# Altium PCB CH32V4x7VET-R0-1v2.PcbDoc (part 1 of 3)
Units mil, origin at the board's own origin, x right, y up, seen from the top; angles counter-clockwise.
Board outline 4188.98 x 2720.08 mil, 2 copper layers (Top Layer, Bottom Layer); 79 components, 117 nets, 431 pads, 739 vias.
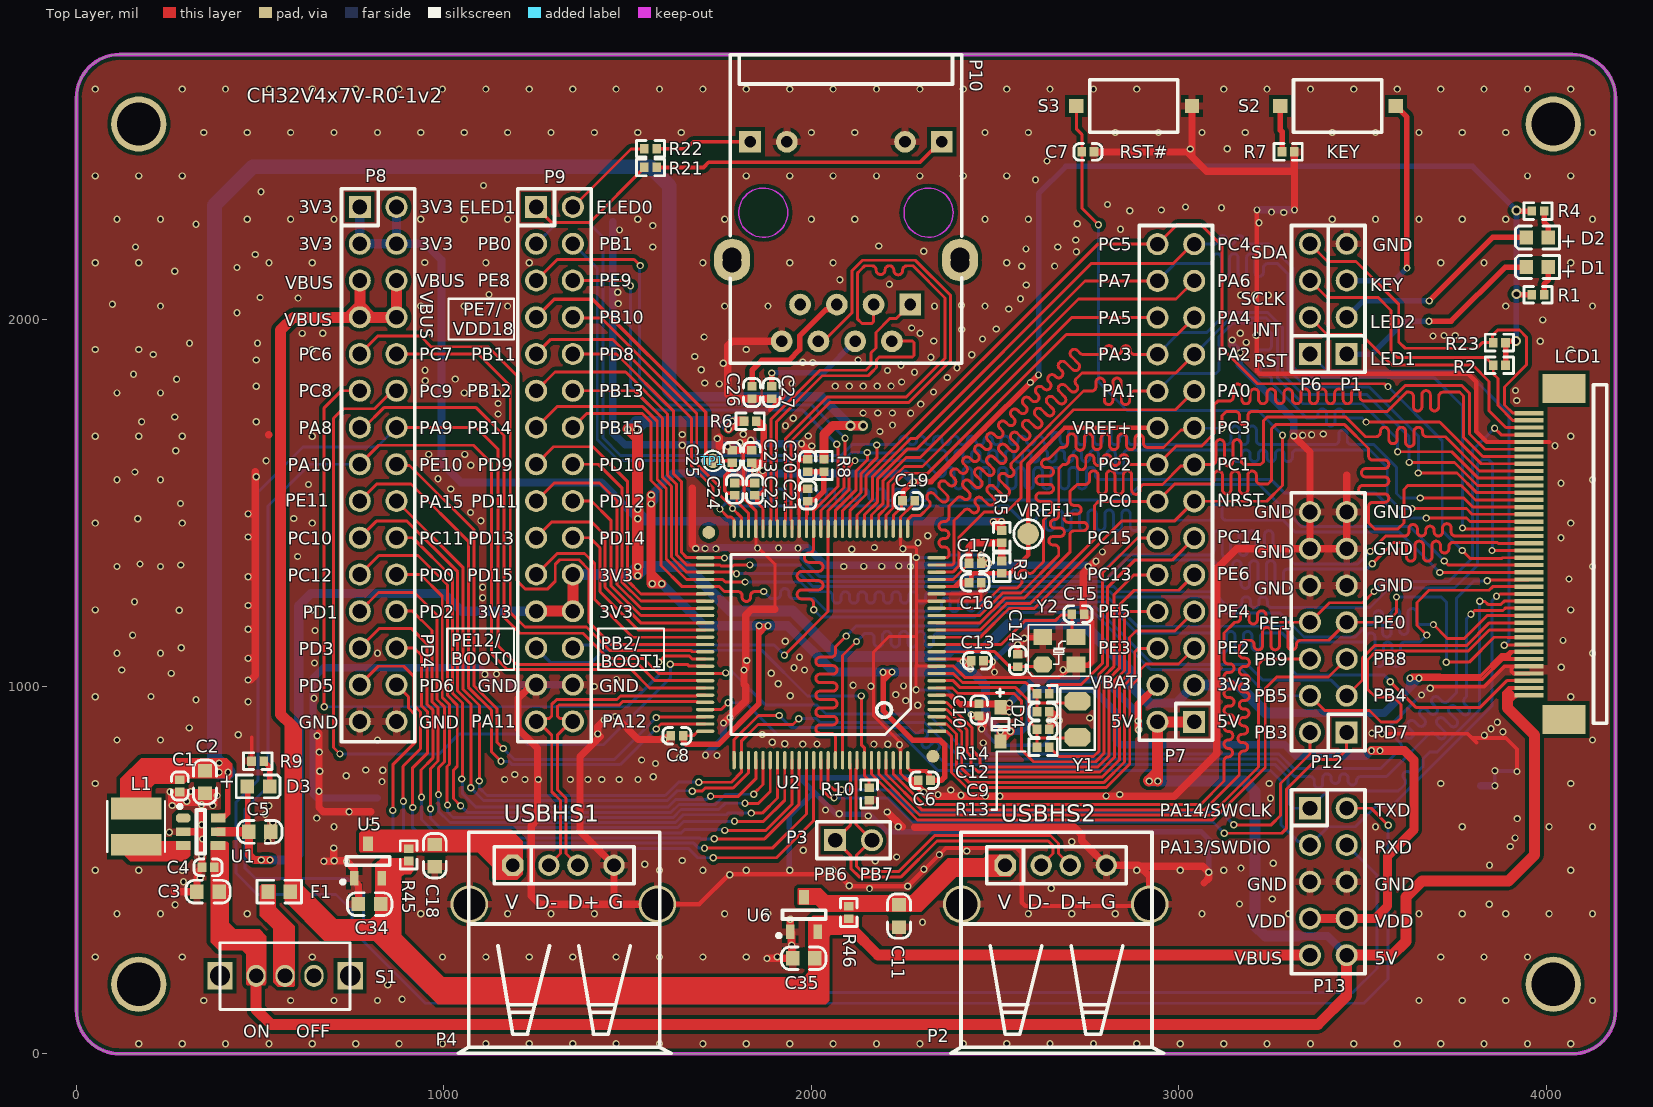
[diagram p0: Top Layer view]
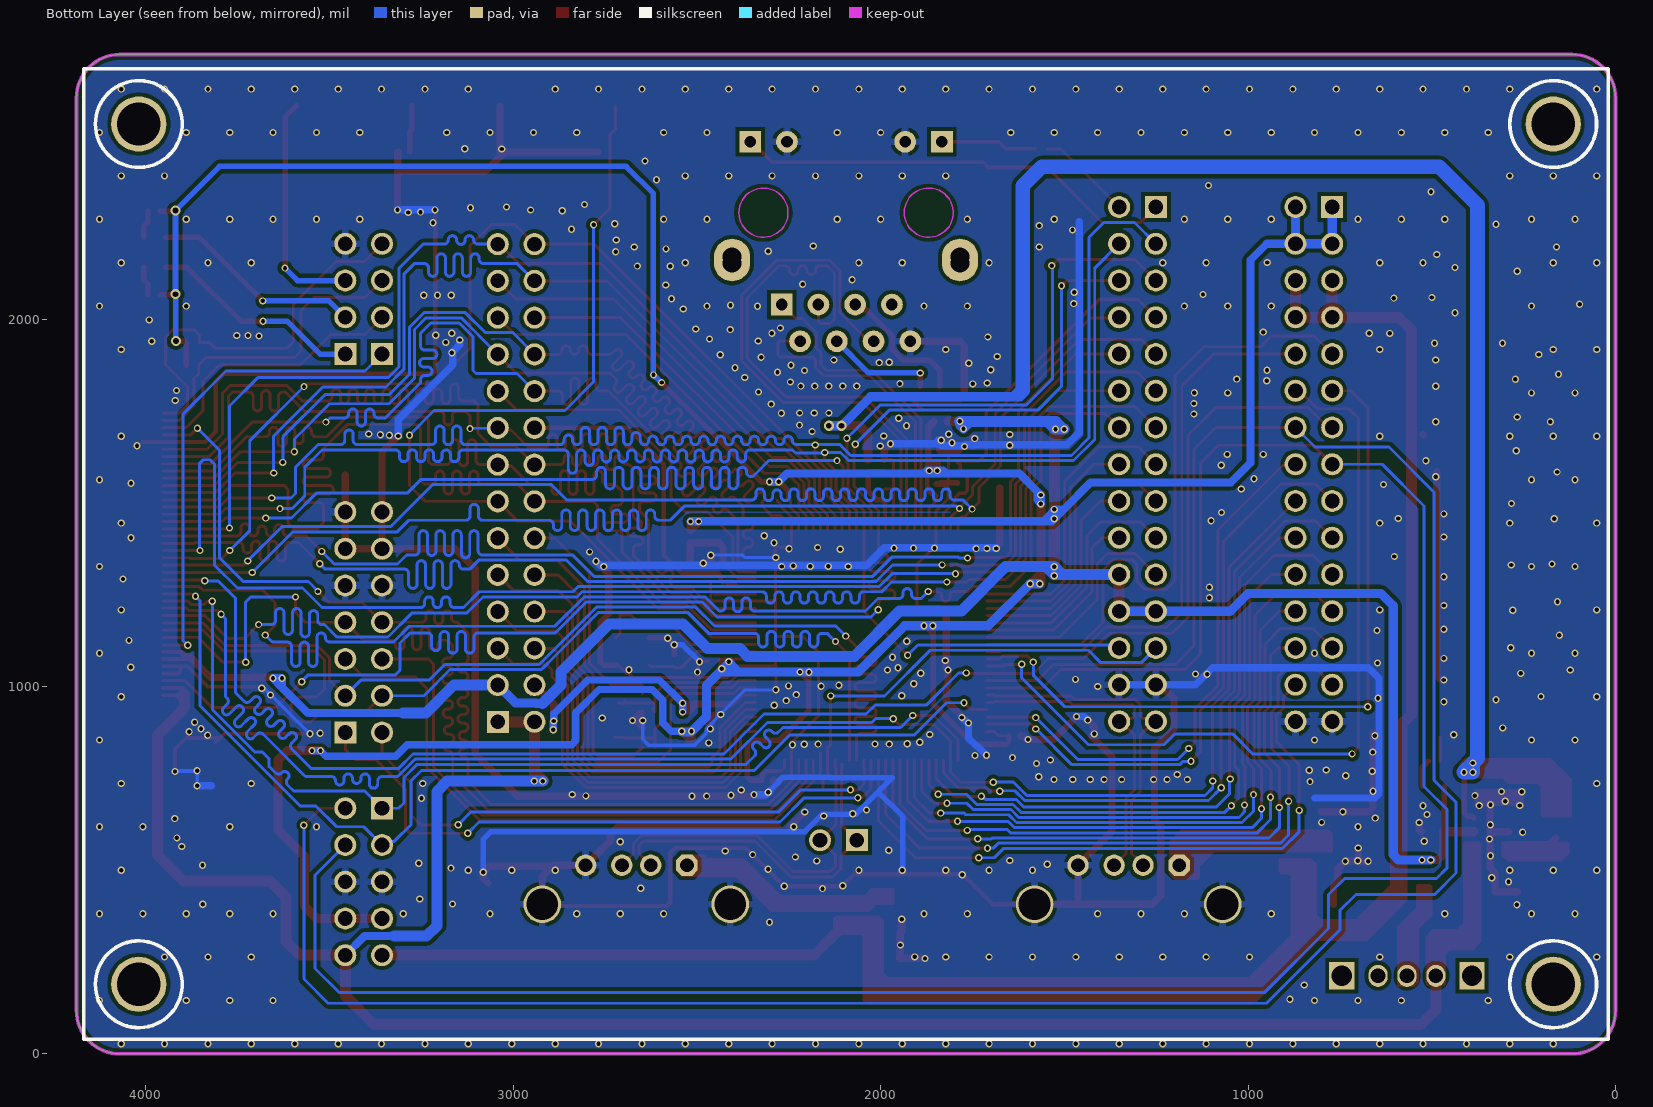
[diagram p1: Bottom Layer view, seen from below]

## Layer stack, top to bottom
Top Solder: solder mask 0.4, Solder Resist, Dk 3.5
Top Layer: signal copper 1.4
Dielectric 1: dielectric 12.6, FR-4, Dk 4.8
Bottom Layer: signal copper 1.4
Bottom Solder: solder mask 0.4, Solder Resist, Dk 3.5

## Board outline
0,118.11 0,2601.97 cw(c118.11,2601.97) 118.11,2720.08 4070.87,2720.08 cw(c4070.87,2601.97) 4188.98,2601.97 4188.98,118.11 cw(c4070.87,118.11) 4070.87,0 118.11,0 cw(c118.11,118.11)

## Design rules (kind name [scope] priority, off if disabled: settings)
Clearance Clearance_1 [InPolygon] p1: gap=10 ignorepadtopadclearanceinfootprint=FALSE
Clearance [All] p2: gap=6 ignorepadtopadclearanceinfootprint=FALSE except(8: Arc-Via Track-Via SMDPad-Via THPad-Via Via-Via Via-Fill Via-Poly Via-Region Via-Hole)
ComponentClearance [All] p1 off: gap=10 collisioncheckmode=3 verticalgap=10 showdistances=FALSE
DiffPairsRouting [All] p1: maxlimit=10 minlimit=7 mostfreqgap=8 toplayer_minwidth=6 toplayer_maxwidth=15 toplayer_prefwidth=8 bottomlayer_minwidth=6 bottomlayer_maxwidth=15 bottomlayer_prefwidth=8 maxuncoupledlength=500
MinimumSolderMaskSliver [All] p1 off: minsoldermaskwidth=10
PolygonConnect PolygonConnect_1 [IsVia] p1: connectstyle=Direct reliefconductorwidth=10 reliefentries=4 polygonreliefangle="90 Angle" airgapwidth=10
PolygonConnect [All] p2: connectstyle=Relief reliefconductorwidth=20 reliefentries=4 polygonreliefangle="90 Angle" airgapwidth=10
RoutingVias [All] p1: holewidth=16 width=28 viastyle="Through Hole" minholewidth=11.81 minwidth=19.68 maxholewidth=28 maxwidth=50
SilkToSilkClearance [All] p1 off: silktosilkclearance=10
SilkToSolderMaskClearance [IsPad] p1 off: minsilkscreentomaskgap=10 clearancetoexposedcopper=TRUE
SolderMaskExpansion [All] p1: expansion=2 istentingtop=FALSE
Width [All] p1: maxlimit=100 minlimit=5 preferedwidth=10
25 further rules are at their usual default settings.

## Classes and differential pairs
component class CH32V4x7V-R0-1v2: C1 C2 C3 C4 C5 C6 C7 C8 C9 C10 C11 C12 C13 C14 C15 C16 C17 C18 C19 C20 C21 C22 C23 C24 C25 C26 C27 C34 C35 D1 D2 D3 D4 F1 L1 LCD1 P1 P2 P3 P4 P6 P7 P8 P9 P10 P12 P13 R1 R2 R3 R4 R5 R6 R7 R8 R9 R10 R13 R14 R21 R22 R23 R45 R46 S1 S2 S3 TP1 U1 U2 U5 U6 VREF1 Y1 Y2
differential pair MDIR: +MDIRP -MDIRN
differential pair MDIT: +MDITN -MDITP
differential pair PA12PA11: +PA12 -PA11
differential pair PB6PB7: +PB6 -PB7

## Components (designator, comment, footprint, x,y, rotation, side; value= is the part's Value field where it differs from the comment)
C1 "NC(0.1uF)" 0402_C 281.67,712.51 r180 top
C2 "NC(10uF)" 0603_C 349.67,709.51 r90 top
C3 "10uF" 0603_C 327.97,441.42 r0 top
C4 "1uF" 0402_C 341.55,507.42 r90 top
C5 "10uF" 0603_C 529.23,604.42 r180 top
C6 "0.1uF" 0402_C 2290.8,744.55 r90 top
C7 "22nF" 0402_C 2769.67,2454.72 r270 top
C8 "0.1uF" 0402_C 1651.2,865.72 r270 top
C9 "12pF" 0402_C 2647.79,883.25 r270 top
C10 "0.1uF" 0402_C 2456.53,919.62 r180 top
C11 "10uF" 0603_C 2238.76,405.31 r270 top
C12 "12pF" 0402_C 2647.79,931.58 r270 top
C13 "0.1uF" 0402_C 2435.12,1069.59 r90 top
C14 "18pF" 0402_C 2561.85,1087.44 r0 top
C15 "18pF" 0402_C 2742.66,1196.96 r270 top
C16 "0.1uF" 0402_C 2429.2,1282.72 r90 top
C17 "0.1uF" 0402_C 2429.2,1335.46 r90 top
C18 "10uF" 0603_C 975.39,569.8 r270 top
C19 "0.1uF" 0402_C 2281.65,1505.47 r270 top
C20 "2.2uF" 0402_C 1990.27,1618.08 r0 top
C21 "0.1uF" 0402_C 1990.27,1537.72 r0 top
C22 "0.1uF" 0402_C 1846.44,1553.59 r0 top
C23 "4.7uF" 0402_C 1838.44,1642.64 r0 top
C24 "NC(0.1uF)" 0402_C 1791.41,1553.59 r0 top
C25 "NC(2.2uF)" 0402_C 1784.41,1642.64 r0 top
C26 "0.1uF" 0402_C 1838.67,1783.2 r180 top
C27 "0.1uF" 0402_C 1891.94,1783.2 r180 top
C34 "10uF" 0603_C 828.23,407.46 r180 top
C35 "10uF" 0603_C 2009.72,260.25 r180 top
D1 "BLUE" 0603+ 4006.24,2141.41 r180 top
D2 "RED" 0603+ 4006.24,2221.95 r180 top
D3 "RED" 0603+ 464.98,728.04 r0 top
D4 "B0520WS" SOD-323 2514.77,943.04 r270 top
F1 "500mA" 0603 582,441.42 r180 top
L1 "NC(2.2uH)" CD32 162.6,618.63 r90 top
LCD1 "NC(MY-RGB)" FPC40P-0.5-FK750M3 4001.2,1360.04 r270 top
P1 "HEADER 4" SIP4-2.54mm 3457.2,1904.72 r180 top
P2 "USBHS2" USBAF 2527.49,513.35 r0 top
P3 "HEADER 2" SIP2-2.54mm 2065.02,581.5 r270 top
P4 "USBHS1" USBAF 1187.49,513.35 r0 top
P6 "NC(HEADER 4)" SIP4-2.54mm 3357.2,1904.72 r180 top
P7 "HEADER 14x2" IDC28-2.54MM 3042.2,903.72 r180 top
P8 "HEADER 15x2" IDC30-2.54MM 771.2,2304.72 r0 top
P9 "HEADER 15x2" IDC30-2.54MM 1251.2,2304.72 r0 top
P10 "HR911105A" HR911105A 2269.49,2039.41 r180 top
P12 "HEADER 7x2" IDC14-2.54mm 3457.2,874.72 r180 top
P13 "LINK" IDC10-2.54mm 3357.2,268.44 r0 top
R1 "1K" 0402 3961.14,2066.03 r0 top
R2 "NC(4.7K)" 0402 3889.47,1874.38 r180 top
R3 "0R" 0402 2518.14,1341.16 r270 top
R4 "1K" 0402 3961.14,2293.88 r0 top
R5 "0R" 0402 2518.14,1424.33 r270 top
R6 "0R" 0402 1816.98,1721.52 r0 top
R7 "10K" 0402 3314.67,2454.72 r180 top
R8 "NC(0R)" 0402 2034.49,1584.62 r90 top
R9 "1K" 0402 510.17,796.79 r180 top
R10 "10K" 0402 2157.34,690.61 r90 top
R13 "NC(0R)" 0402 2647.79,834.91 r180 top
R14 "NC(0R)" 0402 2647.79,979.91 r180 top
R21 "470" 0402 1545.6,2412.62 r0 top
R22 "470" 0402 1545.6,2463.06 r0 top
R23 "NC(4.7K)" 0402 3889.47,1935.82 r180 top
R45 "NC(0Ω)" 0402 903.9,524.81 r90 top
R46 "NC(0Ω)" 0402 2102.24,368 r90 top
S1 "SW SPDT" SW1 567.76,212.3 r0 top
S2 "KEY" SMD_6.1x3.65x2.5mm-KEY 3591.2,2579.72 r180 top
S3 "RST#" SMD_6.1x3.65x2.5mm-KEY 3036.2,2579.72 r180 top
TP1 "Testpoint" TESTPOINT2 1732.05,1613.93 r0 top
U1 "CH2003V" SOT-23-6 291.11,641.82 r270 top
U2 "CH32V407VET" LQFP100 2341.12,877.87 r90 top
U5 "CH213K" SOT-23-3 756.55,477.64 r0 top
U6 "CH213K" SOT-23-3 1943.12,331.76 r0 top
VREF1 "PAD" TESTPOINT1 2590.38,1414.89 r90 top
Y1 "32768Hz" FC-135 2724.35,861.74 r90 top
Y2 "25MHz" XT3225 2629.89,1059.72 r0 top
? "" HOLE 169.69,189.37 r180 bottom
? "Comment" HOLE 169.69,2530.71 r180 bottom
? "Comment" HOLE 4019.29,2530.71 r180 bottom
? "Comment" HOLE 4019.29,189.37 r180 bottom

## Footprints (in the part's own frame and the unit in brackets; to place one, negate y for a bottom-side part, rotate by r counter-clockwise, add the part's x,y. Pads: shape width x height; smd on the part's side, far side on the other; paste and mask are expansions set on the pad)
0402 [mm]
  rect 0.6x0.65 smd mask+0.051: 1(0,0) 2(0.85,0)
  silkscreen extent -0.55,-0.58 1.4,0.57
0402_C [mm]
  rect 0.65x0.6 smd mask+0.051: 1(0,0) 2(0,-0.85)
  silkscreen extent -0.58,-1.4 0.57,0.55
0603 [mm]
  rect 0.93x0.98 smd: 1(0,0) 2(1.54,0)
  silkscreen extent -0.76,-0.79 2.3,0.79
0603+ [mm]
  rect 0.93x0.98 smd: 1(0,0) 2(1.54,0)
  silkscreen extent -0.76,-0.79 2.27,0.79
0603_C [mm]
  rect 0.93x0.98 smd mask+0.051: 1(0,0) 2(1.54,0)
  silkscreen extent -0.76,-0.79 2.31,0.79
CD32 [mm]
  rect 1.5x3.5 smd: 1(-1.25,0) 2(1.25,0)
  silkscreen extent -1.75,-2 1.75,2
FC-135 [mil]
  oct 50x70 smd: 1(0,0) 2(98.43,0)
  silkscreen extent -35,-47 133,47
FPC40P-0.5-FK750M3 [mm]
  rect 2x3 smd: 0(-11.436,1.202) 0(11.436,1.202)
  rect 0.3x2 smd: 1(9.75,-1.202) 2(9.25,-1.202) 3(8.75,-1.202) 4(8.25,-1.202) 5(7.75,-1.202) 6(7.25,-1.202) 7(6.75,-1.202) 8(6.25,-1.202) 9(5.75,-1.202) 10(5.25,-1.202) 11(4.75,-1.202) 12(4.25,-1.202) 13(3.75,-1.202) 14(3.25,-1.202) 15(2.75,-1.202) 16(2.25,-1.202) 17(1.75,-1.202) 18(1.25,-1.202) 19(0.75,-1.202) 20(0.25,-1.202) 21(-0.25,-1.202) 22(-0.75,-1.202) 23(-1.25,-1.202) 24(-1.75,-1.202) 25(-2.25,-1.202) 26(-2.75,-1.202) 27(-3.25,-1.202) 28(-3.75,-1.202) 29(-4.25,-1.202) 30(-4.75,-1.202) 31(-5.25,-1.202) 32(-5.75,-1.202) 33(-6.25,-1.202) 34(-6.75,-1.202) 35(-7.25,-1.202) 36(-7.75,-1.202) 37(-8.25,-1.202) 38(-8.75,-1.202) 39(-9.25,-1.202) 40(-9.75,-1.202)
  silkscreen extent -11.7,3.24 11.7,4.17, body extent -12.2,-1.75 12.2,4.55, height 2
HOLE [mm]
  round 3.81 hole 3: 0(0,0)
  silkscreen extent -3,-3 3,3
HR911105A [mm]
  rect 1.5x1.5 hole 0.8: 1(0,0) 9(-2.175,-11.252) 12(11.075,-11.252)
  round 1.5 hole 0.8: 2(1.27,2.54) 3(2.54,0) 4(3.81,2.54) 5(5.08,0) 6(6.35,2.54) 7(7.62,0) 8(8.89,2.54) 10(0.365,-11.252) 11(8.535,-11.252)
  round 2.5 hole 1.3: ""(-3.43,-2.852) ""(-3.43,-3.3) ""(12.32,-3.3) ""(12.32,-2.852)
  Keep-Out Layer circle w0.1: c10.165,-6.352 r1.7
  Keep-Out Layer circle w0.1: c-1.265,-6.352 r1.7
  silkscreen extent -3.55,-17.27 12.45,4.06
IDC10-2.54mm [mil]
  rect 60x60 hole 40: 1(0,400)
  round 60 hole 40: 2(100,400) 3(0,300) 4(100,300) 5(0,200) 6(100,200) 7(0,100) 8(100,100) 9(0,0) 10(100,0)
  silkscreen extent -50,-50 150,450
IDC14-2.54mm [mil]
  rect 60x60 hole 40: 1(0,0)
  round 60 hole 40: 2(100,0) 3(0,-100) 4(100,-100) 5(0,-200) 6(100,-200) 7(0,-300) 8(100,-300) 9(0,-400) 10(100,-400) 11(0,-500) 12(100,-500) 13(0,-600) 14(100,-600)
  silkscreen extent -50,-652 151,50
IDC28-2.54MM [mil]
  rect 60x60 hole 40: 1(0,0)
  round 60 hole 40: 2(100,0) 3(0,-100) 4(100,-100) 5(0,-200) 6(100,-200) 7(0,-300) 8(100,-300) 9(0,-400) 10(100,-400) 11(0,-500) 12(100,-500) 13(0,-600) 14(100,-600) 15(0,-700) 16(100,-700) 17(0,-800) 18(100,-800) 19(0,-900) 20(100,-900) 21(0,-1000) 22(100,-1000) 23(0,-1100) 24(100,-1100) 25(0,-1200) 26(100,-1200) 27(0,-1300) 28(100,-1300)
  silkscreen extent -50,-1351 150,50
IDC30-2.54MM [mil]
  rect 60x60 hole 40: 1(0,0)
  round 60 hole 40: 2(100,0) 3(0,-100) 4(100,-100) 5(0,-200) 6(100,-200) 7(0,-300) 8(100,-300) 9(0,-400) 10(100,-400) 11(0,-500) 12(100,-500) 13(0,-600) 14(100,-600) 15(0,-700) 16(100,-700) 17(0,-800) 18(100,-800) 19(0,-900) 20(100,-900) 21(0,-1000) 22(100,-1000) 23(0,-1100) 24(100,-1100) 25(0,-1200) 26(100,-1200) 27(0,-1300) 28(100,-1300) 29(0,-1400) 30(100,-1400)
  silkscreen extent -50,-1455 150,50
LQFP100 [mm]
  round 0.889 smd: 0(-1.727,0.254) 0(13.746,15.748)
  rect 0.229x1.27 smd mask+0.051: 1(0,0)
  oval 0.229x1.27 smd mask+0.051: 2(0.5,0) 3(1,0) 4(1.5,0) 5(2,0) 6(2.5,0) 7(3,0) 8(3.5,0) 9(4,0) 10(4.5,0) 11(5,0) 12(5.5,0) 13(6,0) 14(6.5,0) 15(7,0) 16(7.5,0) 17(8,0) 18(8.5,0) 19(9,0) 20(9.5,0) 21(10,0) 22(10.5,0) 23(11,0) 24(11.5,0) 25(12,0) 51(12,16) 52(11.5,16) 53(11,16) 54(10.5,16) 55(10,16) 56(9.5,16) 57(9,16) 58(8.5,16) 59(8,16) 60(7.5,16) 61(7,16) 62(6.5,16) 63(6,16) 64(5.5,16) 65(5,16) 66(4.5,16) 67(4,16) 68(3.5,16) 69(3,16) 70(2.5,16) 71(2,16) 72(1.5,16) 73(1,16) 74(0.5,16) 75(0,16)
  oval 1.27x0.229 smd mask+0.051: 26(14,2) 27(14,2.5) 28(14,3) 29(14,3.5) 30(14,4) 31(14,4.5) 32(14,5) 33(14,5.5) 34(14,6) 35(14,6.5) 36(14,7) 37(14,7.5) 38(14,8) 39(14,8.5) 40(14,9) 41(14,9.5) 42(14,10) 43(14,10.5) 44(14,11) 45(14,11.5) 46(14,12) 47(14,12.5) 48(14,13) 49(14,13.5) 50(14,14) 76(-2,14) 77(-2,13.5) 78(-2,13) 79(-2,12.5) 80(-2,12) 81(-2,11.5) 82(-2,11) 83(-2,10.5) 84(-2,10) 85(-2,9.5) 86(-2,9) 87(-2,8.5) 88(-2,8) 89(-2,7.5) 90(-2,7) 91(-2,6.5) 92(-2,6) 93(-2,5.5) 94(-2,5) 95(-2,4.5) 96(-2,4) 97(-2,3.5) 98(-2,3) 99(-2,2.5) 100(-2,2)
  silkscreen extent -0.22,1.79 12.21,14.21
SIP2-2.54mm [mil]
  rect 60x60 hole 40: 1(0,0)
  round 60 hole 40: 2(0,100)
  silkscreen extent -50,-50 50,150
SIP4-2.54mm [mil]
  rect 60x60 hole 40: 1(0,0)
  round 60 hole 40: 2(0,-100) 3(0,-200) 4(0,-300)
  silkscreen extent -50,-350 50,50
SMD_6.1x3.65x2.5mm-KEY [mm]
  rect 1x1 smd: 1(0,0) 2(8,0)
  silkscreen extent 0.98,-1.83 7.08,1.83
SOD-323 [mm]
  rect 1x0.83 smd: 1(0,0) 2(2.36,0)
  silkscreen extent -1.28,-0.6 1.58,0.6
SOT-23-3 [mm] "SOT-23-3"
  rect 0.6x1 smd: 1(0,0) 2(1.9,0)
  rect 0.7x1 smd: 3(0.95,2.4)
  silkscreen extent -0.93,-0.38 2.45,1.49
SOT-23-6 [mm] "SOT-23-6"
  oct 0.6x1 smd: 1(0,0)
  rect 0.6x1 smd: 2(0.95,0) 3(1.9,0) 5(0.95,2.4) 6(0,2.4)
  rect 0.6x1.04 smd: 4(1.9,2.4)
  silkscreen extent -0.93,-0.38 2.45,1.49
SW1 [mm]
  rect 1.75x1.9 hole 1.4: 0(-4.5,0) 0(4.5,0)
  oval 1.321x1.524 hole 1.016: 1(0,0) 2(-2,0) 3(2,0)
  silkscreen extent -4.51,-2.31 4.5,2.29
TESTPOINT1 [mm]
  round 1.5 smd: 1(0,0)
  silkscreen extent -1,-1 1,1
TESTPOINT2 [mm]
  round 1 smd: 1(0,0)
  silkscreen extent -0.7,-0.7 0.7,0.7
USBAF [mm]
  round 2.6 hole 2.2: 0(-3,-2.7) 0(10,-2.7)
  oct 1.473x1.473 hole 0.965: 1(0,0)
  round 1.473 hole 0.965: 2(2.5,0) 3(4.5,0) 4(7,0)
  silkscreen extent -3.75,-12.99 10.95,2.29
XT3225 [mm]
  oct 1.3x1.1 smd: 1(0,0)
  rect 1.3x1.1 smd: 2(2.3,0) 3(2.3,1.9) 4(0,1.9)
  silkscreen extent -1.02,-0.8 3.27,2.74

## Part data
C1 C2 C3 C4 C5 C6 C7 C8 C9 C10 C11 C12 C13 C14 C15 C16 C17 C18 C19 C20 C21 C22 C23 C24 C25 C26 C27 C34 C35: library part CAP, "Capacitor"
D1 D2 D3: library part LED0, "Typical INFRARED GaAs LED", LatestRevisionDate=08-Jul-2005, LatestRevisionNote="Mech Layer 1 removed.", PackageDescription="LED; 2 Leads", PackageReference=LED-0, Published=8-Jun-2000, Publisher="Altium Limited"
D4: library part DIODE, "Diode"
F1: library part FUSE1, "Fuse"
L1: library part INDUCTOR
LCD1: library part MY-RGB
P1: "Header, 4-Pin"
P2 P4: library part USB, "USB Port"
P3: "Header, 2-Pin"
P6: library part "HEADER 4", "Header, 4-Pin"
P7: "Header, 14-Pin, Dual row"
P8 P9: "Header, 15-Pin, Dual row"
P12: "Header, 7-Pin, Dual row"
P13: library part "Header 5X2H", "Header, 5-Pin, Dual row, Right Angle", LatestRevisionDate=17-Jul-2002, LatestRevisionNote="Re-released for DXP Platform.", Publisher="Altium Limited"
R1 R2 R4 R7 R9 R10 R13 R14 R21 R22 R23 R45 R46: library part RES
R3 R5 R6 R8: library part R
S2 S3: library part KEY1
TP1: "测试点"
U1: "Step-Down DC-DC Converter, 5V input, 1.23V * 800mA output, with LDO 3.3V * 200mA"
U2: "RISC-V FPU HD-MCU, 175MHz, USB_480M, 100M Ethernet & Phy, CAN, DVP, ADC, DAC"
U5 U6: "Ideal Diode 5V*1A"
VREF1: "焊盘"
Y1 Y2: library part XTAL, "Crystal Oscillator", LatestRevisionDate=17-Jul-2002, LatestRevisionNote="Re-released for DXP Platform.", PackageDescription="Crystal, Thru-Hole; 2 Leads; Body 3.1 x 8.2 mm (Dia.xH)", PackageReference=R38, Published=8-Jun-2000, Publisher="Altium Limited"

## Via types
v1: diameter 19.68, hole 11.81, Top Layer to Bottom Layer, tented both sides, 734 vias
v2: diameter 27.56, hole 15.75, Top Layer to Bottom Layer, tented both sides, 5 vias

## Nets (pads, with @x,y where several pads share a name; then routed paths per layer and width w, separated by ;. In a path a pad name is that pad's centre, name@x,y a point inside that pad or via, vN(x,y) a via of type N, cw(c..) or ccw(c..) an arc to the next point about the centre after c; other vN are vias at no path point)
1V2: C1.2 C2.2 L1.2 R8.2 U1.6 | length 4806.4
  Top Layer w15: U1.6@385.6,641.82 389.91,646.13 403.45,646.13 412.24,654.92 412.24,758.07 v1@407.69,762.61
  Top Layer w25: L1.2@162.6,684.85 162.6,721.08 208.57,767.05 C2.2@346.59,767.05 ; R8.2@2034.49,1618.77 2034.49,1685.49 2059.17,1710.16 2106.37,1710.16 2106.86,1709.67 2107.67,1709.67 2107.85,1709.49 v2(2141.16,1709.49) ; C2.2@346.59,767.05 412.13,767.05 412.13,768.11 387.84,792.41 371.94,792.41 C2.2@346.59,767.05
  Bottom Layer w25: 1605.61,1821.61 1605.61,1803.79 1620.96,1788.44 1640.92,1788.44 ; 1613.09,1816.27 1640.92,1788.44 ; v2(2141.16,1709.49) v2(2106.37,1709.49) 2027.42,1788.44 1640.92,1788.44
  Bottom Layer w40: 1613.09,1816.27 1613.09,2363.02 1562.12,2413.99 479.8,2413.99 375.63,2309.82 375.63,804.2 v1(388.29,791.54) ; v1(388.29,791.54) 412.58,767.24 v1(412.58,766.18) v1(388.29,766.18) v1(388.29,791.54)
3V3: C5.2 D3.1 LCD1.6 LCD1.7 P7.3 P8.1 P8.2 P8.3 P8.4 P9.22 P9.23 P9.24 R5.1 R6.1 U1.5 | length 9386.6
  Top Layer w10: v1@3628.45,1022.51 v1@3631.01,1022.51 ; v1@3629.62,1025.24 3633.92,1029.54 3711.25,1029.54 ; v1@3630.17,1023.35 v1@3631.01,1022.51 ; v1@3654.88,1019.76 3826.11,1019.76 3880.98,1074.62 3881.14,1074.62 ; v1@3654.88,1029.23 3822.19,1029.23 3878.43,1085.47 3891.99,1085.47 ; 3680.55,1022.51 v1@3631.01,1022.51 ; 3680.89,1022.17 v1(3653.86,1022.17) 3631.35,1022.17 v1@3631.01,1022.51 ; 3888.75,1080.73 3892.11,1080.73 3898.22,1074.62 ; 3899.79,1077.8 3899.79,1085.47 ; LCD1.6@3953.86,1074.62 3898.22,1074.62 ; LCD1.7@3953.86,1094.31 3908.63,1094.31 ; 3881.14,1074.62 3891.99,1085.47 ; 3881.14,1074.62 3898.22,1074.62 ; 3891.99,1085.47 3899.79,1085.47 ; 3891.99,1085.47 3900.83,1094.31 3908.63,1094.31 ; 3899.79,1085.47 3908.63,1094.31
  Top Layer w15: D3.1@464.98,728.04 466.79,726.23 466.79,606.23 C5.2@468.6,604.42
  Top Layer w20: v1(2495.61,1448.95) 2496.08,1448.48 v1@2514.44,1448.48 ; v1@2495.98,1447.37 2495.98,1445.51 2517.15,1424.33 R5.1@2518.14,1424.33 2518.14,1448.72 v1(2517.9,1448.95)
  Top Layer w22: C5.2@468.6,604.42 468.6,597.57 470.04,596.13 470.04,541.6 483.93,527.71 v1(503.03,527.71) ; v1@503.09,527.71 v1(526.75,527.71)
  Top Layer w25: U1.5@385.6,604.42 C5.2@468.6,604.42 ; v1(1774.54,1700.9) 1795.17,1721.52 R6.1@1816.98,1721.52
  Top Layer w30: P9.23@1251.2,1204.72 P9.24@1351.2,1204.72 P9.22@1351.2,1304.72 ; v1(1500.69,1700.13) v1(1524.11,1700.13) 1527.23,1697.02 1527.23,1675.74 ; v1@1504.51,1698.46 1527.23,1675.74 ; v1@1527.45,1304.48 v1(1527.45,1325.93) 1527.69,1326.18 v1(1527.69,1456.1) v1(1527.69,1481.86) 1527.23,1482.32 1527.23,1675.74
  Bottom Layer w22: P8.4@871.2,2204.72 949.43,2204.72 994.11,2160.05 994.11,1607.92 1047.16,1554.88 1428.92,1554.88 1501.93,1481.86 ; v1(2517.9,1448.95) 2517.35,1449.5 1556.94,1449.5 ; 3300.47,927.67 3559.37,927.67 3629.22,997.52 ; v1@3629.22,1020.22 3629.22,997.52 ; v1(3629.48,1022.17) 3652.47,1022.17 v1@3653.14,1021.5 ; v1(3653.86,1022.17) 3629.22,997.52 ; 1501.93,1481.86 v1(1527.69,1456.1) ; 1501.93,1481.86 v1(1527.69,1481.86) v1@1527.69,1478.76 ; v1(1527.69,1456.1) v1@1527.69,1478.76 ; v1(1527.69,1456.1) 1534.29,1449.5 1556.94,1449.5 ; v1@1527.69,1478.76 1556.94,1449.5
  Bottom Layer w25: v1(503.03,527.71) v1(526.75,527.71) 590.6,527.71 605.25,542.36 605.25,1219.58 638.89,1253.22 999.98,1253.22 1048.48,1204.72 P9.23@1251.2,1204.72 P9.24@1351.2,1204.72 ; P8.1@771.2,2304.72 P8.3@771.2,2204.72 P8.4@871.2,2204.72 P8.2@871.2,2304.72 ; 1752.48,1720.52 1754.92,1720.52 v1(1774.54,1700.9) 1784.48,1710.83 1784.48,1720.52 v1(1784.48,1721.52) ; 2920.08,953.72 2936.69,953.72 2937.69,954.72 2993.2,954.72 P7.3@3042.2,1003.72
  Bottom Layer w30: P9.22@1351.2,1304.72 1506.24,1304.72 ; v1(1500.69,1700.13) v1(1524.11,1700.13) 1526.31,1700.13 1546.7,1720.52 ; v1@1506.25,1703.21 1523.56,1720.52 1546.7,1720.52 ; 1548.64,1325.41 1527.95,1304.72 1506.24,1304.72 ; 1752.48,1720.52 1546.7,1720.52 ; 1754.92,1720.52 1784.48,1720.52 v1@1785.38,1720.52 ; 2920.08,953.72 2870.03,1003.77 2870.03,1038.99 2739.22,1169.8 2537.65,1169.8 2470.92,1103.07 2383.35,1103.07 2362.38,1082.1 2071.46,1082.1 1948.35,1205.21 1780.73,1205.21 1660,1325.93 v1(1527.45,1325.93) 1506.24,1304.72 ; P7.3@3042.2,1003.72 3161.99,1003.72 3238.04,927.67 3275.09,927.67 3300.47,927.67
  other v1: 1527.45,1301.08
+5V: C3.2 C4.2 LCD1.1 LCD1.2 P7.1 P7.2 P13.10 S1.2 U1.4 | length 6455.2
  Top Layer w10: 3884.89,960.75 3884.89,976.27 3884.89,982.8 3894.25,992.17 3897.97,995.88 3906.89,995.88 ; 3887.27,973.57 3887.27,976.27 3894.9,983.89 ; 3899.16,960.91 3905.11,960.91 3912.21,968.01 ; 3904.02,976.2 3902.22,976.2 3894.9,983.52 ; LCD1.1@3916.97,972.77 3912.21,968.01 ; LCD1.1@3953.86,976.2 3920.39,976.2 3913.54,976.2 ; LCD1.2@3953.86,995.88 3906.89,995.88 ; 3894.9,983.52 3894.9,983.89 ; 3894.9,983.52 3894.9,965.06 3905.03,975.19 ; 3894.9,983.89 3900.05,989.04 ; 3900.05,989.04 3903.74,992.74 3906.89,995.88 ; 3900.05,989.04 3900.7,989.04 3903.14,986.61 3906.5,983.24 3913.54,976.2 ; 3905.03,975.19 3906.04,976.2 3913.54,976.2 ; 3905.03,975.19 3912.21,968.01
  Top Layer w30: U1.4@387.1,563.52 387.1,507.42 387.1,442.92 C3.2@388.6,441.42 ; S1.2@489.02,212.3 489.02,120.93 529.4,80.55 3379.72,80.55 3457.2,158.03 P13.10@3457.2,268.44 3580.78,268.44 3618.14,305.81 3618.14,426.34 3662.69,470.88 3897.63,470.88 3967.8,541.04 3967.8,867.94 3894.9,940.84 3894.9,965.06 ; v1@2917.87,743.34 2942.2,767.67 ; v1(2919.56,742.31) 2920.78,743.53 v1@2940.64,743.53 ; v1(2942.7,742.31) 2942.2,742.81 2942.2,767.67 ; P7.1@3042.2,903.72 P7.2@2942.2,903.72 2942.2,767.67
  Top Layer w40: U1.4@388.6,558.76 388.6,330.76 406.17,313.18 471.45,313.18 489.02,295.61 S1.2@489.02,212.3
  Bottom Layer w22: 3324.78,320.31 3405.33,320.31 P13.10@3457.2,268.44
  Bottom Layer w30: v1(2919.56,742.31) v1(2942.7,742.31) 3180.02,742.31 3207.99,714.35 3207.99,348.4 3236.08,320.31 3324.78,320.31
BOOT0: P9.25 R10.2 U2.94 | length 1225.9
  Top Layer w8: v1(2136.18,974.21) 2136.18,841.36 2144.27,833.27 2144.27,757.59 2157.34,744.52 R10.2@2157.34,724.07
  Bottom Layer w8: P9.25@1251.2,1104.72 1291.2,1064.72 1401.04,1064.72 1434.79,1098.48 1865.24,1098.48 1989.51,974.21 v1(2136.18,974.21)
BOOT1: LCD1.25 P9.26 U2.37 | length 3914.4
  Top Layer w8: v1(1926.84,1084.7) 2045.85,1203.71 U2.37@2045.85,1429.05 2045.85,1478.4 2103.17,1535.72 2103.17,1598.99 v1(2118.86,1614.68) ; v1(3674,1458.17) 3783.55,1458.17 3793.08,1448.64 LCD1.25@3953.86,1448.64
  Bottom Layer w8: P9.26@1351.2,1104.72 1358.96,1112.48 1899.06,1112.48 v1(1926.84,1084.7) ; v1(2118.86,1614.68) 2304.46,1614.68 2337,1582.14 2344.51,1574.63 ccw(c2353,1583.11) 2365,1583.11 2365,1584.46 cw(c2377,1584.46) 2389,1584.46 2389,1549.61 ccw(c2401,1549.61) 2413,1549.61 2413,1584.46 cw(c2425,1584.46) 2437,1584.46 2437,1549.61 ccw(c2449,1549.61) 2461,1549.61 2461,1584.46 cw(c2473,1584.46) 2485,1584.46 2485,1549.61 ccw(c2497,1549.61) 2509,1549.61 2509,1584.46 cw(c2521,1584.46) 2533,1584.46 2533,1549.61 ccw(c2545,1549.61) 2557,1549.61 2557,1584.46 cw(c2569,1584.46) 2581,1584.46 2581,1549.61 ccw(c2593,1549.61) 2605,1549.61 2605,1584.46 cw(c2617,1584.46) 2629,1584.46 2629,1549.61 ccw(c2641,1549.61) 2653,1549.61 2653,1584.46 cw(c2665,1584.46) 2677,1584.46 2677,1549.61 ccw(c2689,1549.61) 2701,1549.61 2701,1584.46 cw(c2713,1584.46) 2725,1584.46 2725,1549.61 ccw(c2737,1549.61) 2749,1549.61 2749,1584.46 cw(c2761,1584.46) 2773,1584.46 2773,1575.68 ccw(c2785,1575.68) 2785,1563.68 2806.1,1563.68 3250.68,1563.68 3287.32,1527.04 3534.65,1527.04 3603.52,1458.17 v1(3674,1458.17)
ELED0: P9.2 R22.1 | length 260
  Top Layer w8: P9.2@1351.2,2304.72 1509.53,2463.06 R22.1@1545.6,2463.06
ELED1: P9.1 R21.1 | length 374.9
  Top Layer w8: P9.1@1251.2,2304.72 1293.77,2262.15 1396.12,2262.15 1545.6,2411.63 R21.1@1545.6,2412.62
GND: C1.1 C2.1 C3.1 C4.1 C5.1 C6.1 C7.1 C8.2 C9.1 C10.1 C11.2 C12.1 C13.2 C14.1 C15.1 C16.2 C17.2 C18.2 C19.1 C20.1 C21.1 C22.1 C23.1 C24.1 C25.1 C26.1 C27.1 C34.2 C35.2 LCD1.4 LCD1.5 LCD1.36 P1.4 P2.0 P2.4 P4.0 P4.4 P8.29 P8.30 P9.27 P9.28 P10.8 P10.10 P10.11 P12.9 P12.10 P12.11 P12.12 P12.13 P12.14 P13.5 P13.6 R7.1 R9.2 R10.1 S3.1 U1.2 U2.10 U2.19 U2.20 U2.27 U2.41 U2.47 U2.99 U5.1 U6.1 Y2.2 Y2.4 | length 23551.1
  Top Layer w8: 1814.96,1561.45 1816.95,1559.45 1816.95,1556.45 1816.95,1553.93 1816.95,1509.93 1849,1477.89 U2.47@1849,1429.05 1849,1384.5 1900.9,1332.6 1900.9,1209.72 ; 1815.65,1560.86 1815.65,1642.64 1815.65,1643.91 1815.96,1644.22 ; 1823.72,1546.64 C22.1@1847.41,1546.64 ; U2.41@1967.11,1429.05 1967.11,1479.67 1965.48,1481.3 1965.48,1538.01 ; C20.1@1988.27,1618.08 1970.16,1618.08 1965.48,1613.39 1965.48,1538.01 ; C21.1@1990.27,1537.72 1965.77,1537.72 1965.48,1538.01 ; 2271.49,746.19 2259.64,746.19 ; C19.1@2281.65,1505.47 2273.84,1497.66 2273.84,1491.95 2242.7,1460.81 U2.27@2242.7,1429.05 2242.7,1384.74 2247.38,1380.05 2281.21,1380.05 2285.9,1375.37 v1(2285.9,1350.96) ; v1(2285.33,990.73) 2285.33,1058.23 2286.83,1059.73 ; v1@2286.83,1350.03 2286.83,1232.2 ; C6.1@2290.8,744.55 2273.13,744.55 2261.28,744.55 2259.64,746.19 ; U2.20@2341.12,1251.89 2454.35,1251.89 2462.67,1260.21 ; C16.2@2462.67,1282.72 2462.67,1260.21 ; C13.2@2468.58,1069.59 2470.86,1067.31 v1(2493.4,1067.31) ; v1@2495.63,1064.66 2495.63,1057.61 2496.46,1056.78 2496.46,1027.08 2494.08,1024.71 ; v1(2685.03,1045.33) 2687.27,1043.1 2687.27,1035.18 ; Y2.2@2720.44,1057.72 2714.5,1057.72 2691.97,1035.18 2687.27,1035.18 ; 2259.64,746.19 2242.7,763.14 U2.99@2242.7,799.13 2242.7,846.52 2169.12,920.09 2169.12,1093.11 2211.69,1135.68 2286.83,1135.68 ; 2286.83,1059.73 2286.83,1135.68 ; 2286.83,1059.73 2291.52,1055.04 U2.10@2341.12,1055.04 2387.38,1055.04 2417.71,1024.71 2494.08,1024.71 ; 2286.83,1135.68 2286.83,1232.2 ; 2286.83,1232.2 U2.19@2341.12,1232.2 2457.98,1232.2 2462.67,1236.89 2462.67,1260.21 ; 2494.08,1024.71 2674.5,1024.71 2682.74,1032.95 2685.03,1032.95 2687.27,1035.18
  Top Layer w10: R9.2@476.71,796.79 476.71,861.5 ; C9.1@2647.79,883.25 2647.79,888.99 v1(2647.79,907.41) C12.1@2647.79,931.58 ; v1(3553.39,871.42) 3786.2,871.42 3798.13,859.49 ; v1@3689.85,998.71 3830.3,998.71 3886.53,1054.94 3912.39,1054.94 ; 3810.31,847.31 3798.13,859.49 ; v1(3920.71,768.68) 3920.71,828.9 3890.12,859.49 3798.13,859.49 ; LCD1.4@3953.86,1035.25 3911.37,1035.25 3905.87,1040.75 3905.87,1048.42 3912.39,1054.94 ; LCD1.5@3953.86,1054.94 3912.39,1054.94
  Top Layer w12: P4.0@1595.13,407.61 1695.09,407.61 v1@1776.58,489.1 ; v1(1777.95,487.73) v1@1776.58,489.1 ; 1874.82,1778.88 1913.8,1778.88 ; 1887.74,1752.82 1913.8,1778.88 ; 1922.99,1788.07 1913.8,1778.88 ; v1@2103.26,456.43 v1(2262.48,456.43) 2366.33,560.29 2559.3,560.29 2566.67,552.92 2567.01,552.92 2572.7,547.23 2572.7,411.78 2582.14,402.33 2916.47,402.33 P2.0@2921.19,407.06 ; v1(2103.26,457.8) 2071.96,489.1 v1@1776.58,489.1 ; v1(3212.9,2296.99) 3212.9,1858.33 3219.93,1851.31 3787.67,1851.31 3809.58,1829.4 3809.58,1693.74 3838.15,1665.17 LCD1.36@3953.86,1665.17 4008.37,1665.17
  Top Layer w15: C1.1@277.6,709.42 279.1,707.92 344.1,707.92 C2.1@345.6,706.42 ; C24.1@1791.41,1553.59 1791.75,1553.93 1816.95,1553.93 C22.1@1837.17,1553.93 ; 1814.96,1556.45 1816.95,1556.45 ; C22.1@1847.41,1551.64 1847.46,1551.59 C22.1@1848.44,1551.59 ; v1@2557.77,1106.74 v1@2561.74,1110.71 ; v1(2561.63,1113.28) 2561.74,1113.17 v1@2561.74,1110.71 ; C14.1@2561.85,1087.44 2561.74,1087.55 v1@2561.74,1110.71 ; Y2.4@2629.89,1132.52 2583.55,1132.52 2565.21,1114.17 2563.79,1114.17 2562.97,1113.35 2562.97,1111.94 v1@2561.74,1110.71 ; Y2.2@2720.44,1057.72 2754.05,1057.72 2762.98,1066.64 2762.98,1175.66 C15.1@2742.66,1195.98
  Top Layer w20: 267.37,441.42 C3.1@327.97,441.42 327.97,492.86 341.55,506.44 C4.1@341.55,507.42 v1@341.55,592.71 ; U1.2@291.11,604.42 329.84,604.42 v1@341.55,592.71 ; C2.1@344.1,707.92 341.55,705.37 v1@341.55,592.71 ; v1(467.28,1017.7) 474.33,1017.7 486.43,1029.81 486.43,1076.25 ; v1(467.28,1076.25) 486.43,1076.25 ; v1(467.28,1155.41) 486.43,1155.41 ; v1(467.28,1220.18) 486.43,1220.18 ; v1(467.28,1298.81) 486.43,1298.81 ; v1(467.28,1406.54) 486.43,1406.54 ; v1(467.28,1469.55) 486.43,1469.55 ; 486.43,1584.19 486.43,1469.55 ; 522.81,1684.85 523.02,1684.64 ; C5.1@529.23,604.42 534.39,609.58 v1(534.39,629.55) ; v1@660.2,873.01 660.2,670.6 671.92,658.88 v1(742.13,658.88) 801.54,658.88 ; v1(673.43,524.23) 700.39,524.23 v1(701.5,525.34) ; v1(700.29,560.33) 700.29,526.54 v1(701.5,525.34) ; U5.1@756.55,477.64 756.55,502.87 v1(735.29,524.13) 734.08,525.34 v1(701.5,525.34) ; U5.1@757,478.28 757,469.31 767.6,458.72 C34.2@767.6,407.46 ; P9.27@1251.2,1004.72 1240.38,1004.72 1215.08,979.43 1213.43,979.43 1201.72,967.71 1201.72,884.48 1254.78,831.42 1254.78,638.03 1238.02,621.28 1238.02,429.99 1260.95,407.06 1456.54,407.06 ; v1(1418.71,870.88) 1418.71,890.59 v1(1436.42,908.31) ; 1425.75,863.84 1370.53,808.62 1370.53,605.91 P4.4@1463.08,513.35 1463.08,413.6 1456.54,407.06 ; v1(1466.95,917.96) 1529.29,855.61 v1(1599,855.61) 1603.63,855.61 1610.94,862.93 1615.93,862.93 1617.74,864.74 C8.2@1617.74,865.72 ; P4.0@1581.19,407.06 1456.54,407.06 ; 1676.38,1539.49 1676.38,1386.19 v1@1685.29,1377.29 ; 1749.52,1653.65 v1@1749.52,1678.02 ; v1(1760.91,900.4) 1821.63,961.11 1821.63,1000.69 1817.07,1005.25 v1(1817.07,1044.84) 1821.63,1049.4 1821.63,1193.87 1837.48,1209.72 1900.9,1209.72 ; C25.1@1787.84,1642.99 1788.18,1642.64 1791.41,1642.64 1815.65,1642.64 C23.1@1838.44,1642.64 ; 1818.49,1664.62 C23.1@1837.33,1645.77 ; C23.1@1837.33,1643.76 C23.1@1837.33,1645.77 ; v1@1837.33,1668.14 C23.1@1837.33,1645.77 ; C23.1@1839.35,1643.76 C23.1@1837.33,1645.77 ; v1(1879.68,259.75) 1880.19,260.25 v1@1910.86,260.25 ; C27.1@1891.94,1783.2 C26.1@1838.67,1783.2 1784.48,1783.2 1772.76,1794.91 1772.76,1927.69 1784.48,1939.41 P10.8@1919.49,1939.41 ; v1(1907.28,263.84) v1@1910.86,260.25 ; v1(1942.56,366.08) 1942.56,332.32 U6.1@1943.12,331.76 ; U6.1@1946.65,330.29 1946.65,262.7 C35.2@1949.09,260.25 v1@1910.86,260.25 ; v1(1973.44,1660.22) 1990.27,1643.39 C20.1@1990.27,1618.08 ; v1(2206.74,658.39) 2247.34,617.79 ; 2271.4,746.28 2271.49,746.19 2273.13,744.55 2290.8,726.88 ; 2280.82,616.28 2716.36,616.28 2736.51,596.13 2736.51,579.93 P2.4@2803.08,513.35 2890.46,513.35 2892.9,510.92 ; C6.1@2290.8,744.55 2290.8,726.88 ; v1@2440.92,921.06 2455.09,921.06 C10.1@2456.53,919.62 ; C10.1@2455.53,918.62 2456.51,918.62 C10.1@2462.61,912.53 ; v1@2460.63,1357.32 2460.85,1357.09 2460.85,1337.27 C17.2@2462.67,1335.46 2480.29,1335.46 v1@2480.62,1335.13 ; C10.1@2462.61,919.72 C10.1@2462.61,912.53 ; v1(2463.52,884.39) 2462.61,885.31 C10.1@2462.61,912.53 ; 2468.5,896.07 2468.5,906.64 C10.1@2462.61,912.53 ; C9.1@2647.79,888.99 2665.96,907.15 v1(2675.41,907.15) 2657.06,925.5 C12.1@2653.82,925.5 ; C15.1@2740.62,1198.7 2740.62,1306.5 v1(2774.7,1340.58) ; C7.1@2769.67,2454.72 3023.15,2454.72 3036.2,2441.67 ; P2.0@2921.19,407.06 2921.19,482.63 2892.9,510.92 ; S3.1@3036.2,2579.72 3036.2,2441.67 ; 3068.73,464.82 3081.65,477.74 3081.65,494.31 v1(3081.52,494.44) 3065.04,510.92 2892.9,510.92 ; v1(3313.25,1681.79) 3357.2,1637.84 P12.14@3357.2,1474.72 P12.12@3357.2,1374.72 ; R7.1@3314.67,2454.72 3314.67,2408.74 ; v1(3315.2,2296.99) 3315.2,2408.2 3314.67,2408.74 ; 3457.2,1574.72 P12.13@3457.2,1474.72 P12.11@3457.2,1374.72 P12.12@3357.2,1374.72 ; 486.43,1076.25 486.43,1155.41 ; 486.43,1155.41 486.43,1220.18 ; 486.43,1220.18 486.43,1298.81 ; 486.43,1298.81 486.43,1406.54 ; 486.43,1406.54 486.43,1469.55 ; 2290.8,726.88 2301.53,716.15 2301.53,714.8 2314.87,701.46 2987.95,701.46 3103.36,816.88 3103.36,1320.09 3157.99,1374.72 P12.12@3357.2,1374.72 ; 3036.2,2441.67 3075.6,2402.27 3308.2,2402.27 3314.67,2408.74
  Bottom Layer w8: v1(2285.33,990.73) 2369.55,990.73 2456.58,903.7 2456.58,902.28 ; v1(2285.9,1350.96) 2370.11,1350.96 2376.39,1357.24 v1(2462.83,1357.24)
  Bottom Layer w10: 2456.58,902.28 2474.99,883.88 2474.99,872.15 2507.59,839.54 2630.89,839.54 2647.79,856.44 v1(2647.79,907.41) ; v1(3553.39,871.42) 3553.98,871.42 3661.59,979.03 3662.17,979.03 3676.17,993.03 v1@3687.47,993.03 ; v1@3860.53,730.57 v1(3860.53,770.76) 3861.57,769.72 3919.67,769.72 v1(3920.71,768.68)
  Bottom Layer w15: v1@1939.71,499.25 1939.71,645.75 2006.92,712.96 ; v1@2301.53,716.15 2279.42,738.26 2279.42,740.55 2267.05,752.92 2137.78,752.92 2136.46,751.6 1968.28,751.6 2006.92,712.96 ; v1(2493.4,1067.31) 2539.37,1113.28 v1(2561.63,1113.28) ; v1(3081.52,494.44) 3081.52,584.69 3061.15,605.07 2205.99,605.07 2158.4,652.65 2067.23,652.65 2006.92,712.96
  Bottom Layer w20: 819.19,696.54 655.73,696.54 644.01,708.25 644.01,1022.2 672.53,1050.72 1097.18,1050.72 1143.18,1004.72 P9.27@1251.2,1004.72 P9.28@1351.2,1004.72 ; v1(1436.42,908.31) 1446.08,917.96 v1(1466.95,917.96) ; 1460.09,2264.42 1460.09,1690.54 1493.14,1657.49 1771.77,1657.49 1774.3,1654.96 1833.49,1654.96 1843.49,1664.96 v1@1843.49,1669.98 ; v1@1685.29,1377.29 1990.01,1377.29 2037.89,1329.41 2763.53,1329.41 v1(2774.7,1340.58) ; v1(1712.02,812.41) 1736.22,836.61 1738.14,836.61 1760.91,859.39 v1@1760.91,897.1 ; v1(1760.91,900.4) v1@1760.91,897.1 ; v1(1779.11,915.3) v1@1760.91,897.1 ; 1843.49,1660.22 v1(1973.44,1660.22) ; v1@2301.53,716.15 2312.13,705.55 v1(2344.93,705.55) ; v1(3145.6,1942.74) 3145.6,1929.88 v1(3167.12,1908.37) 3164.56,1905.81 3164.56,1874.84 3313.25,1726.15 v1(3313.25,1681.79) ; v1(3212.9,2296.99) v1(3315.2,2296.99) ; 3821.24,729.65 v1(3860.53,729.65)
  other v1: 169.58,27.24 287.69,27.24 405.8,27.24 523.91,27.24 642.02,27.24 760.14,27.24 878.25,27.24 996.36,27.24 1114.47,27.24 1232.58,27.24 1350.69,27.24 1468.8,27.24 1586.91,27.24 1705.02,27.24 1823.13,27.24 1941.24,27.24 2059.35,27.24 2177.46,27.24 2295.57,27.24 2413.68,27.24 2531.79,27.24 2649.9,27.24 2768.01,27.24 2886.12,27.24 3004.23,27.24 3122.34,27.24 3240.45,27.24 3358.56,27.24 3476.67,27.24 3594.78,27.24 3712.89,27.24 3831,27.24 3949.11,27.24 4067.22,27.24 346.75,145.35 582.97,145.35 701.08,145.35 819.19,145.35 3653.84,145.35 3771.95,145.35 3890.06,145.35 4126.28,145.35 886.42,148.53 847.6,187.35 51.47,263.46 287.69,263.46 642.02,263.46 996.36,263.46 1114.47,263.46 1232.58,263.46 1350.69,263.46 1468.8,263.46 1586.91,263.46 1705.02,263.46 1823.13,263.46 3712.89,263.46 3831,263.46 3949.11,263.46 1946.39,296.35 2302.51,358.28 110.53,381.57 228.64,381.57 464.86,381.57 937.3,381.57 1173.52,381.57 1291.63,381.57 1409.74,381.57 1764.07,381.57 1882.18,381.57 2590.84,381.57 2708.95,381.57 2827.06,381.57 3063.28,381.57 3299.5,381.57 3653.84,381.57 3771.95,381.57 3890.06,381.57 4008.17,381.57 4126.28,381.57 268.53,406.08 3845.06,407.16 3165.31,408 3254.73,421.67 2158.62,449.81 2653.3,450.58 291.49,468.6 336.77,479.3 51.47,499.68 169.58,499.68 287.69,499.68 1586.91,499.68 1705.02,499.68 1823.13,499.68 1941.24,499.68 2059.35,499.68 2886.12,499.68 3004.23,499.68 3122.34,499.68 4067.22,499.68 2306.42,502.31 3169.37,505.55 3846.03,513.62 1546.81,515.73 3257.32,518.85 2174.02,525.14 1648.8,526.3 2232.23,535.98 340.45,539.31 2348.65,542.26 2423.13,552.21 1978.2,553.89 3902.48,564.32 2708.99,577.4 520.86,578.75 343.3,584.88 3915.58,587.72 252.93,603.06 701.08,617.79 2236.51,617.79 3535.72,617.79 3771.95,617.79 4008.17,617.79 4126.28,617.79 340.71,623.84 800,630.03 3921.38,640.3 653.92,641.69 2155.26,647.36 513.39,651.27 2076.02,653.54 2038.55,663.76 524.07,675.12 261.05,676.08 371.1,675.62 340.35,678.15 300.4,687.61 3249.71,695.98 2473.87,701.47 2513.58,701.27 2802.43,702.15 382.93,702.92 2407.43,703.81 2839.74,705.85 255.27,713.21 2306.33,712.27 310.28,714.04 660.17,714.87 2379.79,718 51.47,735.9 3246.44,735.77 3712.89,735.9 4067.22,735.9 831.79,740.95 1165.31,746.83 1220.49,746.83 1257.31,746.83 1344.4,746.83 1392.07,746.83 1429.94,746.83 1477.61,746.83 1528.4,746.83 1569.7,754.21 734.17,757.15 1192.82,760.48 661.96,769.15 833.46,772.13 787.52,772.76 1576.17,790.13 1538.2,799.65 1641.54,806.22 1743.27,812.1 660.63,821.24 2240.01,841.15 1976.47,842.97 2170.37,843.08 2208.17,842.44 1928.05,843.8 2015.69,843.46 2468.3,846.39 1893.57,847.94 110.53,854.01 228.64,854.01 819.19,854.01 4126.28,854.01 655.01,866.06 3831.98,867.04 440.31,868.45 1866.65,868.97 3525.82,872.43 3882.32,876.81 3850.07,885.13 307.12,887.13 3867.36,902.42 2757.95,913.88 2435.19,923.54 2289.62,948.64 467.28,958.07 2256.81,961.48 325.41,964.05 646.49,967.74 51.47,972.12 4067.22,972.12 202.92,972.69 1942.95,974.79 3660.77,976.87 2229.71,977.74 3684.85,994.88 1409.35,999.78 2162.29,1000.2 2250.95,1001.54 2113.9,1002.95 1910.3,1007.07 1469.67,1019.19 1111.71,1033.09 1143.37,1033.75 257.9,1035.53 1891.01,1035.64 2498.46,1039.05 123.62,1044.61 1981.54,1044.57 1952.98,1050.56 4040.91,1052.14 648.05,1063.89 1824.42,1070.42 1967.95,1079.36 110.53,1090.23 228.64,1090.23 819.19,1090.23 4126.28,1090.23 285.16,1105.19 1929.02,1122.67 4045.95,1125.26 2579.84,1131.04 152.9,1139.51 649.18,1152.22 280.11,1207.15 51.47,1208.34 642.02,1208.34 4067.22,1208.34 157.95,1230.37 1105.43,1241.48 1105.43,1269.71 4062.31,1292.26 2754.08,1326.14 110.53,1326.45 228.64,1326.45 2088.65,1326.47 2142.78,1326.76 2191.95,1326.76 2269.77,1326.34 4126.28,1326.45 2237.75,1328.12 284.15,1330.32 173.09,1333.35 2483.16,1335.56 601.92,1353.45 2792.32,1366.12 2110.1,1373.54 1740.4,1375.16 2249.32,1374.96 1685.29,1375.46 1711.02,1375.46 1853.68,1376.47 1910.76,1376.47 1963.93,1376.47 2171.79,1378.03 2290.58,1391.35 4040.32,1404.81 2317.22,1410.38 51.47,1444.57 287.69,1444.57 642.02,1444.57 4067.22,1444.57 1100.74,1450.67 167.03,1456.52 591.4,1456.93 1072.53,1473.24 283.14,1497.91 1018.76,1537.41 631.51,1549.7 4040.32,1552.82 110.53,1562.68 228.64,1562.68 4126.28,1562.68 984,1565.33 489.18,1570.51 159.13,1583.75 1073.32,1601.8 516.22,1613.98 958.67,1631.47 1056.92,1631.47 270.17,1641.36 1772.08,1653.11 2001.32,1654.52 4024.16,1654.79 1648.86,1656.49 1806.07,1663.39 1835.49,1669.98 1743.77,1674.43 51.47,1680.79 169.58,1680.79 287.69,1680.79 642.02,1680.79 4067.22,1680.79 1991.76,1681.64 3337.16,1683.94 3361.78,1685.01 1648.86,1685.53 1814.81,1686.49 3393.35,1686.88 2186.78,1693.91 1930.01,1709.27 2221.16,1711.26 177.39,1720.68 489.54,1720.4 1950.76,1730.09 267.66,1733.15 1147.63,1741.63 2270.26,1743.67 2141.05,1744.28 2180.88,1744.28 2220.72,1744.28 2297.64,1768.35 1147.7,1770.16 3920.07,1778.4 110.53,1798.9 228.64,1798.9 1055.41,1798.9 1146.3,1798.99 2332.54,1801.14 3916.58,1805.24 489.54,1816.92 2065.43,1817.32 2103.37,1817.32 2141.32,1817.32 2179.27,1817.32 2217.22,1817.32 1749.59,1823.46 1947.79,1824.24 1709.89,1825.76 2245.78,1828.41 949.53,1831.97 272.69,1836.25 1031.3,1836.38 2370.14,1840.86 155.38,1849.87 2280.73,1855.18 2207.38,1859.91 948.54,1860.74 1700.59,1861.88 2396.39,1867.36 2243.98,1874.43 1760.19,1879.91 2004.08,1881.38 1976.94,1882.4 489.54,1888.37 2127.5,1888.28 2325.51,1895.84 1682.54,1898.08 2436.51,1902.89 209.33,1903.24 51.47,1917.01 169.58,1917.01 642.02,1917.01 1823.13,1917.01 4067.22,1917.01 492.58,1933.85 307.89,1934.32 3183.6,1936.31 3983.7,1939.68 2333.58,1940.3 2465.99,1945.65 1708.23,1950.82 3692.03,1953.56 3721.95,1954.91 3752.87,1954.91 3211.12,1956.03 614.54,1960.9 670.51,1961.39 2296.16,1961.35 3167.68,1961.46 958.67,1964.34 2409.43,1971.09 2503.66,1972.84 2273.1,1975.72 3990.94,1997.6 436.97,2017.34 2537.49,2027.42 228.64,2035.12 937.3,2035.12 1055.41,2035.12 1173.52,2035.12 1764.07,2035.12 1882.18,2035.12 2335.25,2034.52 2472.73,2035.12 3890.06,2035.12 4126.28,2035.12 2408.71,2037.69 97.85,2039.96 1474.42,2041.94 2569.47,2055.08 603.36,2056.89 499.91,2058.41 3168.72,2064.86 3206.36,2064.86 3244,2064.86 1122.94,2066.7 1473.45,2072.84 2585.34,2092.37 2212.63,2094.66 2077.83,2107.05 267.69,2129.9 436.97,2140.28 2572.81,2143.33 2662.22,2144.04 51.47,2153.23 169.58,2153.23 523.91,2153.23 642.02,2153.23 947.87,2153.73 1114.47,2153.23 1232.58,2153.23 1705.02,2153.23 1941.24,2153.23 2059.35,2153.23 2531.79,2153.23 3712.89,2153.23 3831,2153.23 4067.22,2153.23 486.86,2175.78 2721.6,2182.84 2306.3,2184.51 2584.41,2190.87 160.63,2195.97 1568.73,2196.12 2670.73,2195.84 2183.83,2198.84 2719.76,2214.85 1478.11,2242.61 2841.73,2244.13 1568.73,2254.14 325.41,2257.89 2723.57,2258.96 3218.53,2262.11 110.53,2271.34 228.64,2271.34 464.86,2271.34 582.97,2271.34 701.08,2271.34 937.3,2271.34 1055.41,2271.34 1173.52,2271.34 1527.85,2271.34 1764.07,2271.34 2000.29,2271.34 2118.4,2271.34 2472.73,2271.34 2590.84,2271.34 3417.61,2271.34 3535.72,2271.34 3653.84,2271.34 3771.95,2271.34 3890.06,2271.34 4126.28,2271.34 3285.82,2289.86 3252.74,2291 2867.01,2294.5 2952.87,2296.57 3116.64,2302.86 3018.44,2304.73 2806.08,2311.64 502.46,2346.56 1108.02,2363.28 2610.27,2379.08 51.47,2389.45 169.58,2389.45 287.69,2389.45 1823.13,2389.45 1941.24,2389.45 2059.35,2389.45 2177.46,2389.45 2295.57,2389.45 2413.68,2389.45 2531.79,2389.45 3949.11,2389.45 4067.22,2389.45 2641.6,2429.92 3031.53,2462.6 3132.12,2463.6 346.75,2507.56 464.86,2507.56 582.97,2507.56 701.08,2507.56 819.19,2507.56 937.3,2507.56 1055.41,2507.56 1173.52,2507.56 1291.63,2507.56 1409.74,2507.56 1527.85,2507.56 1645.96,2507.56 2000.29,2507.56 2118.4,2507.56 2472.73,2507.56 2590.84,2507.56 2827.06,2507.56 2945.17,2507.56 3063.28,2507.56 3181.39,2507.56 3417.61,2507.56 3535.72,2507.56 3653.84,2507.56 3771.95,2507.56 3890.06,2507.56 4126.28,2507.56 51.47,2625.67 287.69,2625.67 405.8,2625.67 523.91,2625.67 642.02,2625.67 760.14,2625.67 878.25,2625.67 996.36,2625.67 1114.47,2625.67 1232.58,2625.67 1350.69,2625.67 1468.8,2625.67 1586.91,2625.67 1705.02,2625.67 1823.13,2625.67 1941.24,2625.67 2059.35,2625.67 2177.46,2625.67 2295.57,2625.67 2413.68,2625.67 2531.79,2625.67 2649.9,2625.67 2768.01,2625.67 2886.12,2625.67 3122.34,2625.67 3240.45,2625.67 3358.56,2625.67 3476.67,2625.67 3594.78,2625.67 3712.89,2625.67 3831,2625.67 3949.11,2625.67 4067.22,2625.67
KEY: P1.3 S2.1 | length 631.7
  Top Layer w15: S2.1@3591.2,2579.72 3621.28,2549.65 v1(3621.28,2138.57)
  Bottom Layer w15: P1.3@3457.2,2104.72 3587.44,2104.72 v1(3621.28,2138.57)
LED1: D1.2 P1.1 | length 586.8
  Top Layer w15: v1(3681.24,1994.11) 3741.57,1994.11 3888.87,2141.41 D1.2@3945.61,2141.41
  Bottom Layer w15: P1.1@3457.2,1904.72 3525.88,1904.72 3615.71,1994.56 3680.79,1994.56 v1(3681.24,1994.11)
LED2: D2.2 P1.2 | length 578.4
  Top Layer w15: v1(3681.66,2049.24) 3854.36,2221.95 D2.2@3945.61,2221.95
  Bottom Layer w15: P1.2@3457.2,2004.72 3501.72,2049.24 v1(3681.66,2049.24)
MDIRN: P10.6 U2.42 | length 1499.5
  Top Layer w8: U2.42@1947.42,1429.05 1947.42,1449.83 1945.08,1452.17 1945.08,1668.03 2050.17,1773.12 2265.56,1773.12 2379.29,1886.85 2379.29,2063.62 2282.91,2159.99 2256.95,2159.99 2139.59,2159.99 2124.6,2145 2110.23,2130.63 2110.23,2016.46 2033.18,1939.41 P10.6@2019.49,1939.41
MDIRP: P10.3 U2.43 | length 1513.9
  Top Layer w8: U2.43@1927.74,1429.05 1927.74,1449.83 1930.08,1452.17 1930.08,1674.24 2043.95,1788.12 2259.35,1788.12 2364.29,1893.06 2364.29,2057.4 2276.7,2144.99 2264.6,2144.99 2260.6,2144.99 ccw(c2260.6,2132.99) 2248.6,2132.99 2248.6,2132.26 cw(c2236.6,2132.26) 2224.6,2132.26 2224.6,2132.99 ccw(c2212.6,2132.99) 2200.6,2132.99 cw(c2188.6,2132.99) 2176.6,2132.99 ccw(c2164.6,2132.99) 2164.6,2144.99 2145.8,2144.99 2134.3,2133.49 2125.23,2124.41 2125.23,2000.77 2137.85,1988.14 2164.8,1988.14 2169.49,1992.83 P10.3@2169.49,2039.41 2158.15,2039.41 2158.15,2043.28 P10.3@2156.61,2043.28
MDITN: P10.2 U2.44 | length 851.3
  Top Layer w8: U2.44@1908.05,1429.05 1908.05,1449.83 1905.71,1452.17 1905.71,1721 2028.15,1843.45 2030.27,1845.56 2154.87,1845.56 2162.99,1853.69 2177.61,1868.3 2177.61,1889.35 2184.92,1896.66 2275.17,1896.66 2279.86,1901.34 2279.86,1935.79 2275.17,1940.48 2220.56,1940.48 P10.2@2219.49,1939.41
MDITP: P10.1 U2.45 | length 851.5
  Top Layer w8: U2.45@1888.37,1429.05 1888.37,1449.83 1890.71,1452.17 1890.71,1727.21 2024.06,1860.56 2148.66,1860.56 2162.61,1874.51 2162.61,1907.98 2175.78,1921.15 2175.78,1963.29 2214.38,2001.9 2231.98,2001.9 P10.1@2269.49,2039.41
NetC26_2: C26.2 P10.5 | length 370.8
  Top Layer w15: C26.2@1838.67,1816.66 1838.67,1860.53 1865.28,1887.15 1938.81,1887.15 1968.3,1916.63 1968.3,1954.13 2039.74,2025.58 2043.73,2025.58 2057.57,2039.41 P10.5@2069.49,2039.41
NetC27_2: C27.2 P10.4 | length 299.6
  Top Layer w15: C27.2@1891.94,1816.66 1891.94,1852.91 v1(1892.18,1853.16)
  Bottom Layer w15: v1(1892.18,1853.16) 2033.24,1853.16 P10.4@2119.49,1939.41
NetD1_1: D1.1 R1.2 | length 80.2
  Top Layer w15: R1.2@3994.6,2066.03 3994.6,2094.89 4006.24,2106.52 D1.1@4006.24,2141.41